# Altium PCB ExtendBoard.PcbDoc
Units mil, origin at the board's own origin, x right, y up, seen from the top; angles counter-clockwise.
Board outline 2627.77 x 1590.54 mil, 2 copper layers (Top Layer, Bottom Layer); 12 components, 17 nets, 57 pads, 10 vias.
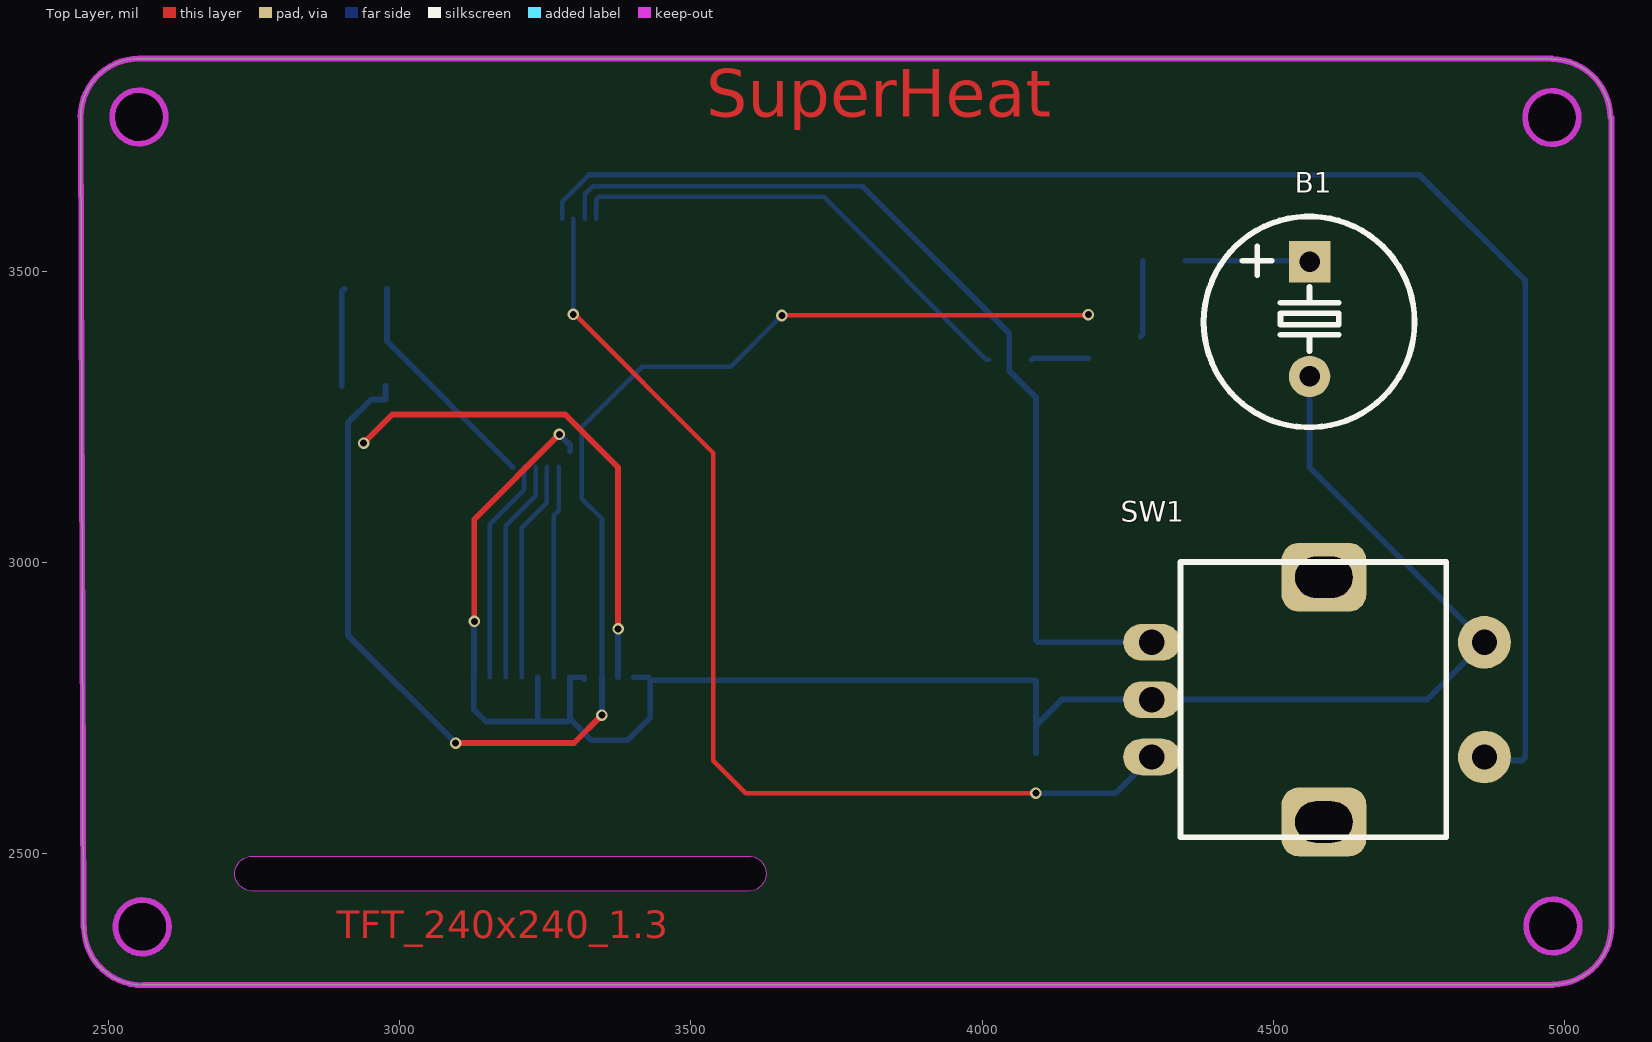
[diagram p0: Top Layer view]
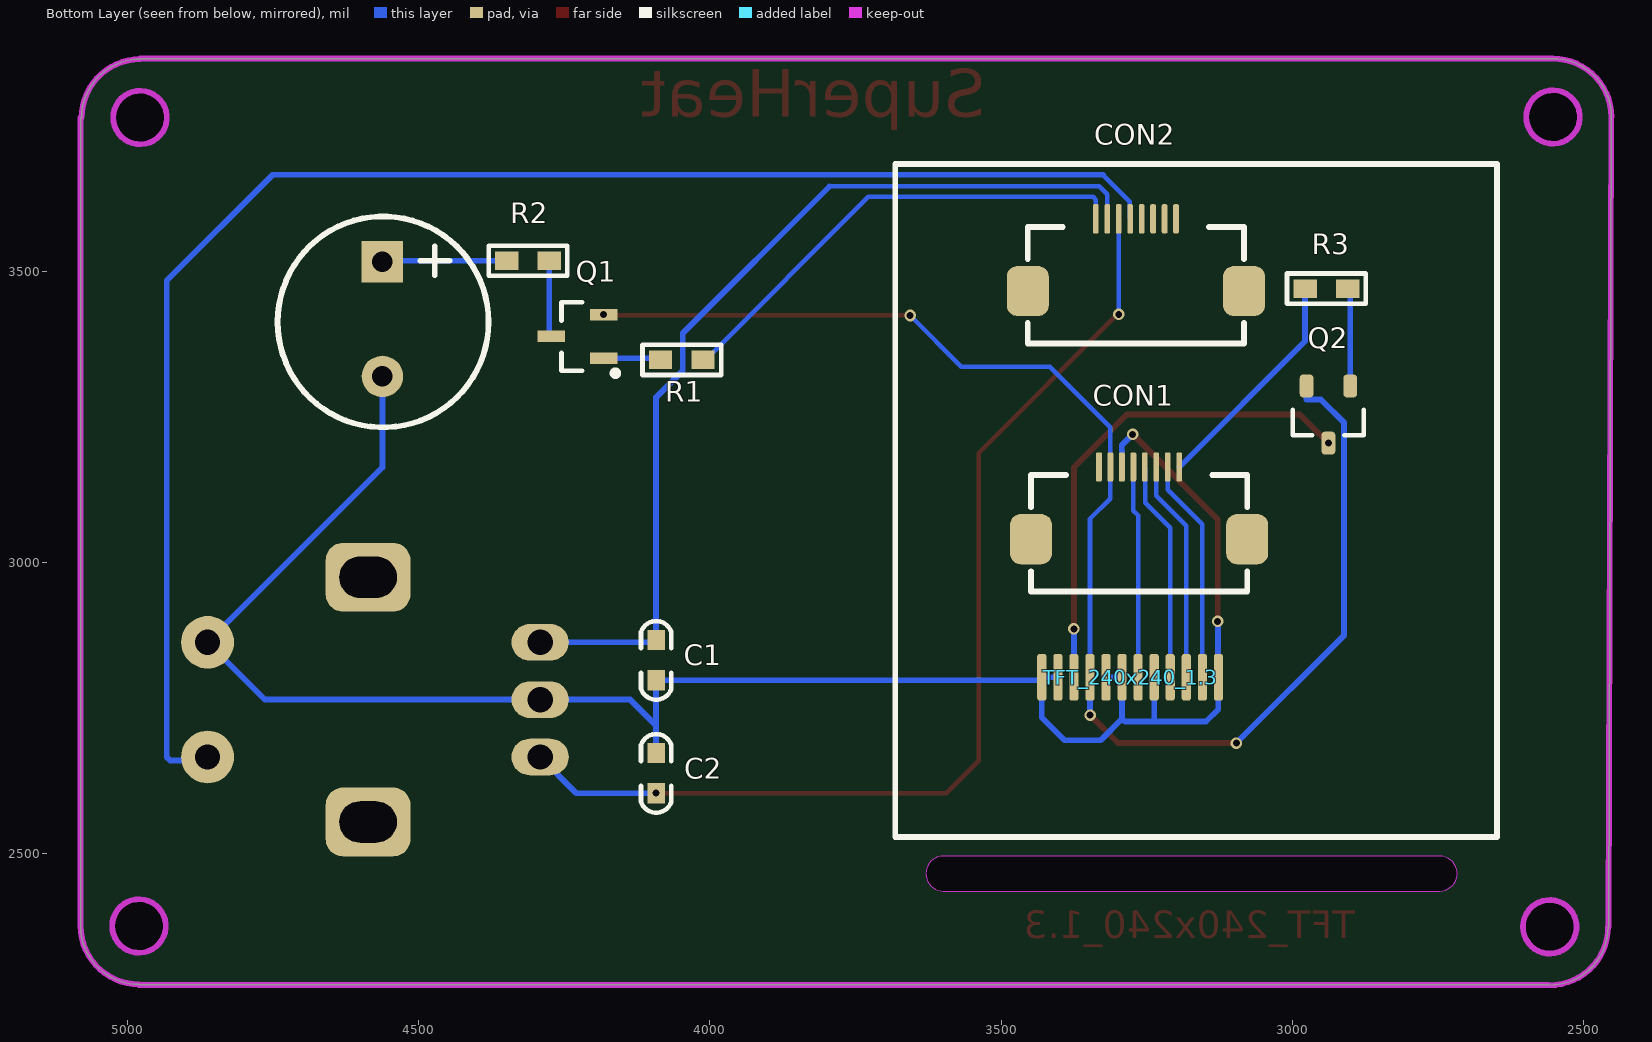
[diagram p1: Bottom Layer view, seen from below]
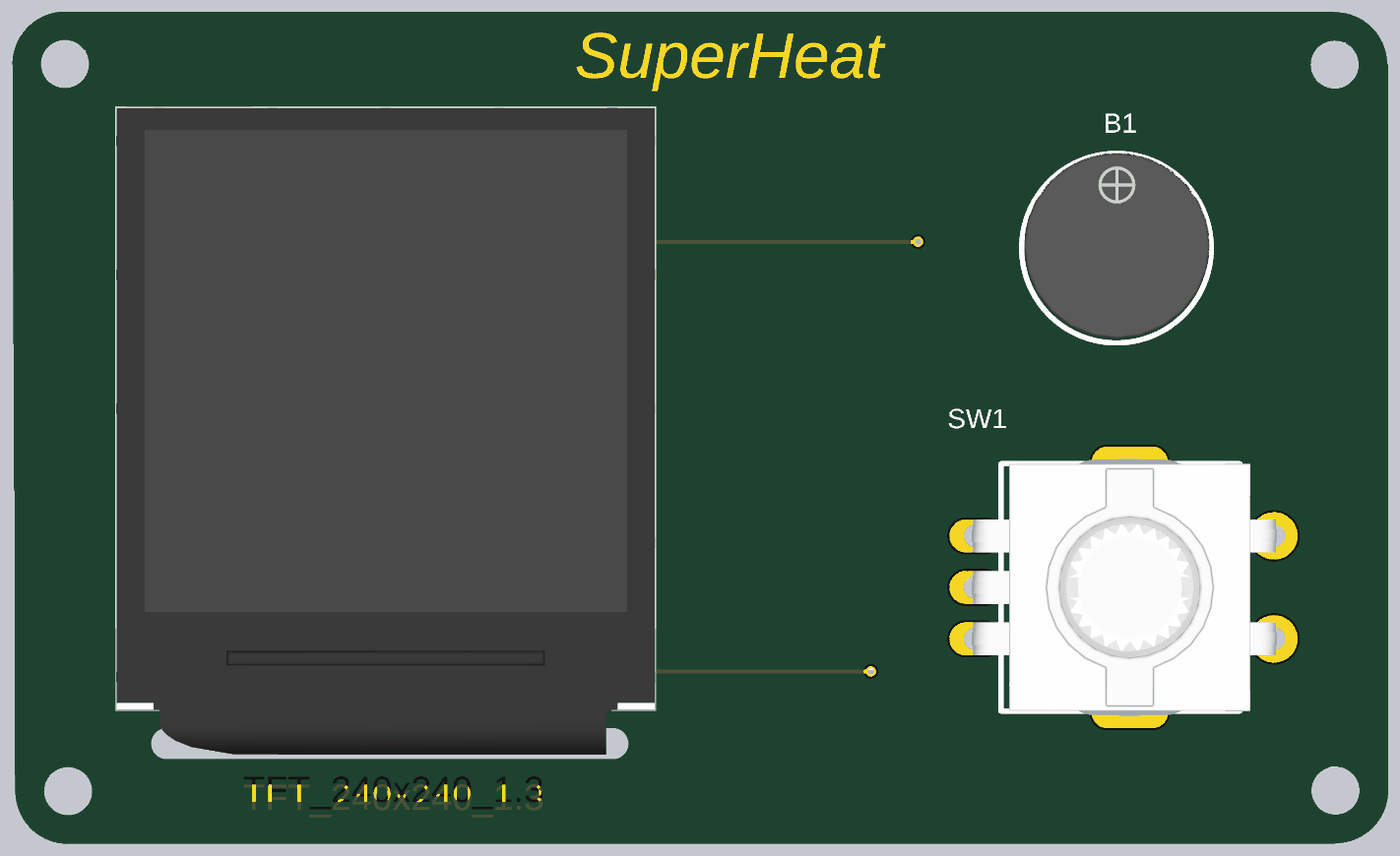
[diagram p2: 3D render of the assembled board from above, using the file's embedded part models]
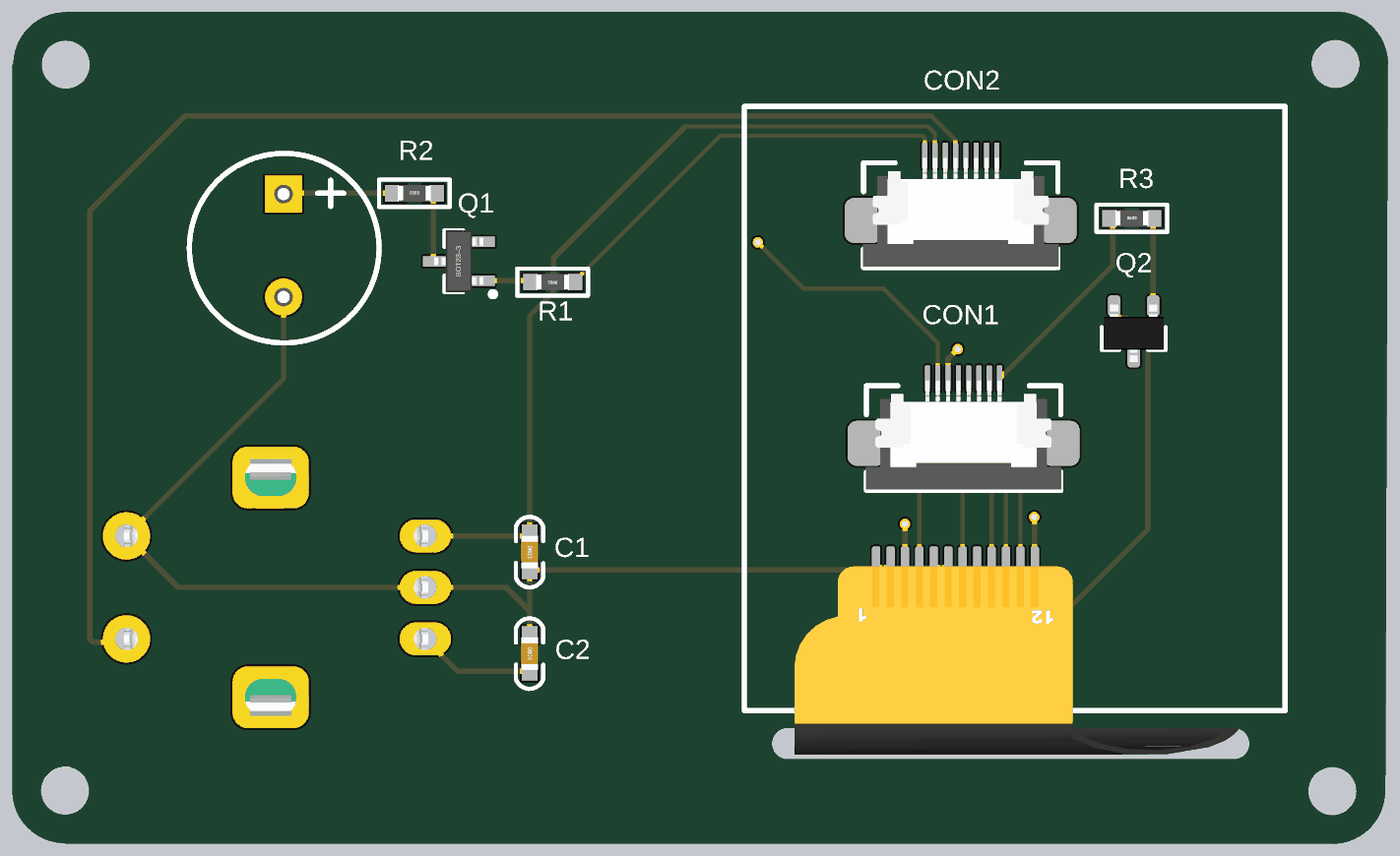
[diagram p3: 3D render of the assembled board from below, using the file's embedded part models]

## Layer stack, top to bottom
Top Solder: solder mask 0.4, Solder Resist, Dk 3.5
Top Layer: signal copper 1.4
Dielectric 1: dielectric 12.6, FR-4, Dk 4.8
Bottom Layer: signal copper 1.4
Bottom Solder: solder mask 0.4, Solder Resist, Dk 3.5

## Board outline
2457.15,2374.64 2452.39,3764.47 2452.23,3764.81 cw(c2552.42,3764.81) 2552.42,3865 4978,3865 4978,3864 cw(c4978,3763.81) 5078.19,3763.81 5080,3763.81 5080,2376 cw(c4979.81,2376) 4979.81,2275.81 4979.81,2275 2560,2275 2558.07,2274.46 cw(c2558.07,2374.65)
cut-out: 2552.5,3719.07 cw(c2552.5,3765.07) 2506.5,3765.07 cw(c2552.5,3765.07) 2552.5,3811.07 cw(c2552.5,3765.07) 2598.5,3765.07 cw(c2552.5,3765.07)
cut-out: 4932,3763.81 ccw(c4978,3763.81) 4978,3717.81 ccw(c4978,3763.81) 5024,3763.81 ccw(c4978,3763.81) 4978,3809.81 ccw(c4978,3763.81)
cut-out: 4933.5,2376.07 ccw(c4979.5,2376.07) 4979.5,2330.07 ccw(c4979.5,2376.07) 5025.5,2376.07 ccw(c4979.5,2376.07) 4979.5,2422.07 ccw(c4979.5,2376.07)
cut-out: 2512.5,2375.07 ccw(c2558.5,2375.07) 2558.5,2329.07 ccw(c2558.5,2375.07) 2604.5,2375.07 ccw(c2558.5,2375.07) 2558.5,2421.07 ccw(c2558.5,2375.07)
cut-out: 2747,2435.98 cw(c2747,2466) 2747,2496.01 3599,2496.01 cw(c3599,2466) 3629.01,2466 cw(c3599,2466) 3599,2435.99
cut-out: 2518,3787
cut-out: 2452,3600

## Design rules (kind name [scope] priority, off if disabled: settings)
Clearance [All] p1: gap=10 ignorepadtopadclearanceinfootprint=TRUE except(0: Arc-Hole Track-Hole SMDPad-Hole THPad-Hole Via-Hole Fill-Hole Poly-Hole Region-Hole Text-Hole; 6: SMDPad-SMDPad)
ComponentClearance [All] p1: gap=10 collisioncheckmode=3 verticalgap=5 showdistances=FALSE
HoleToHoleClearance [All] p1: gap=5 allowstackedmicrovias=TRUE
MinimumSolderMaskSliver [All] p1: minsoldermaskwidth=0
PolygonConnect [All] p1: connectstyle=Relief reliefconductorwidth=10 reliefentries=4 polygonreliefangle="90 Angle" airgapwidth=10
RoutingVias [All] p1: holewidth=12 width=20 viastyle="Through Hole" minholewidth=12 minwidth=20 maxholewidth=28 maxwidth=50
SilkToSilkClearance [All] p1: silktosilkclearance=0
SilkToSolderMaskClearance [IsPad] p1: minsilkscreentomaskgap=0 clearancetoexposedcopper=TRUE
SolderMaskExpansion [All] p1: expansion=4 istentingtop=FALSE
Width [All] p1: maxlimit=20 minlimit=6 preferedwidth=8
25 further rules are at their usual default settings.

## Components (designator, comment, footprint, x,y, rotation, side; value= is the part's Value field where it differs from the comment)
B1 "DC5V" "BEEP 5x9x5.5" 4562,3418 r180 top
C1 "104" "C 0603" 4092,2832 r270 bottom
C2 "104" "C 0603" 4092,2638 r270 bottom
CON1 "FFC_0.5_8" FFC_0.5_8 3263,3075 r180 bottom
CON2 "FFC_0.5_8" FFC_0.5_8 3268.37,3501 r180 bottom
Q1 "SS8550" SOT23-3N 4227,3388 r90 bottom
Q2 "AO3415A" SOT23-3 2938,3254 r270 bottom
R1 "100R" "R 0603" 4048,3348 r0 bottom
R2 "1K" "R 0603" 4312,3518 r180 bottom
R3 "1K" "R 0603" 2941.5,3470 r180 bottom
SW1 "EC11" EC11-B 4576.57,2764.57 r180 top
TFT_240x240_1.3 "LCD-240x240" LCD-240x240-NoHole 3148,3010 r0 top (schematic designator 1)

## Footprints (in the part's own frame and the unit in brackets; to place one, negate y for a bottom-side part, rotate by r counter-clockwise, add the part's x,y. Pads: shape width x height; smd on the part's side, far side on the other; paste and mask are expansions set on the pad)
"BEEP 5x9x5.5" [mm] "5*9*5.5mm(脚距,直径,高度)"
  rect 1.8x1.8 hole 0.9: 1(0,-2.5)
  round 1.8 hole 0.9: 2(0,2.5)
  silkscreen extent -4.58,-4.47 4.62,4.72, body extent -4.5,-4.5 4.5,4.5, height 5.45
"C 0603" [mil] "无极性贴片电容"
  rect 35x30 smd: 1(-35,0) 2(34,0)
  silkscreen extent -67,-26 67,26, body extent -31,-16 31,16, height 32
EC11-B [mm] "数字开关编码器"
  rrect50% 3.7x3 hole 1.8 slot 2.5 at 0 deg: 0(-0.254,5.334) 0(-0.254,-5.334)
  round 2.3 hole 1.1: 1(-7.25,2.5) 2(-7.25,-2.5)
  oval 2.5x1.6 hole 1.1: A(7.25,-2.5) B(7.25,2.5) C(7.25,0)
  silkscreen extent -5.59,-6 6,6, body extent -7.4,-6.24 7.4,6.24, height 22
FFC_0.5_8 [mil]
  rrect50% 72x86 smd: 0(-185.63,-35) 0(185.63,-35)
  rrect50% 10x50 smd: 1(-68.9,89) 2(-49.21,89) 3(-29.53,89) 4(-9.84,89) 5(9.84,89) 6(29.53,89) 7(49.21,89) 8(68.9,89)
  silkscreen extent -186,-125 186,75, body extent -187,-124 187,87, height 82
LCD-240x240-NoHole [mil]
  rrect50% 15.75x80 smd far side: 1(282,-207) 2(254.44,-207) 3(226.88,-207) 4(199.32,-207) 5(171.76,-207) 6(144.2,-207) 7(116.65,-207) 8(89.09,-207) 9(61.53,-207) 10(33.97,-207) 11(6.41,-207) 12(-21.15,-207)
  body extent -499,-565 534,673, height 20
"R 0603" [mil] "1/10W贴片电阻"
  rect 40x31.5 smd: 1(-36.5,0) 2(36.5,0)
  silkscreen extent -68,-26 68,26, body extent -31,-16 31,16, height 16
SOT23-3 [mm]
  rrect50% 1x0.6 smd: 1(-1.246,0.95) 2(-1.246,-0.95) 3(1.246,0)
  silkscreen extent -0.2,-1.55 0.9,1.55, body extent -1.3,-1.45 1.5,1.45, height 1.2
SOT23-3N [mm] "3x1.3x1mm(长宽高)"
  rect 0.5x1.2 smd: 1(-0.95,-1.143) 2(0.95,-1.143) 3(0,1.143)
  silkscreen extent -1.72,-1.78 1.5,0.7, body extent -1.5,-1.2 1.5,1.2, height 1.05

## Part data
B1: library part BEEP, "蜂鸣器", BOM名称=蜂鸣器, 学习资源=www.ooocke.com, 版权归属=源创客
C1 C2: library part C, "无极性贴片电容", BOM名称=无极性贴片电容, 学习资源=www.ooocke.com, 版权归属=源创客
CON1 CON2: "FFC", System=Connector
Q1: library part 8550-SMD, "高频放大-PNP型", BOM名称=高频放大-PNP型, 学习资源=www.ooocke.com, 属性="40V 1.5A 1W 100MHZ", 版权归属=源创客
Q2: "MOSFET", LatestRevisionDate=17-Jul-2002, LatestRevisionNote="Re-released for DXP Platform.", PackageDescription="TO, Flat Index; 3 In-Line, Axial Leads; Body Dia. 4.6mm; Lead Dia. 0.5 mm (max)", PackageReference=E3, PackageVersion=1995/1996, Published=8-Jun-2000, Publisher="Altium Limited"
R1 R2 R3: library part R, "贴片电阻", BOM名称=贴片电阻, 学习资源=www.ooocke.com, 版权归属=源创客
SW1: "数字开关编码器", BOM名称=数字编码开关, 学习资源=www.ooocke.com, 版权归属=源创客
TFT_240x240_1.3: "显示屏"

## Via types
v1: diameter 20, hole 12, Top Layer to Bottom Layer, 10 vias

## Nets (pads, with @x,y where several pads share a name; then routed paths per layer and width w, separated by ;. In a path a pad name is that pad's centre, name@x,y a point inside that pad or via, vN(x,y) a via of type N, cw(c..) or ccw(c..) an arc to the next point about the centre after c; other vN are vias at no path point)
3V3: CON1.2 Q1.2 Q2.2 TFT_240x240_1.3.4 | length 2460.2
  Top Layer w8: v1(3656,3424) 3656.7,3424.7 4181.3,3424.7 v1(4182,3425.4)
  Top Layer w10: v1(3096,2690) 3299,2690 v1(3347,2738)
  Bottom Layer w8: TFT_240x240_1.3.4 3347.32,3074.68 3312.21,3109.79 CON1.2 3312.21,3232.21 3416,3336 3568,3336 v1(3656,3424)
  Bottom Layer w10: Q2.2 2975.4,3280 2951,3280 2911,3240 2911,2875 v1(3096,2690) ; v1(3347,2738) 3347.16,2738.16 3347.16,2802.84 TFT_240x240_1.3.4
5V: CON1.1
BEEP: CON2.1 R1.1 | length 825
  Bottom Layer w8: CON2.1 3337.27,3622.97 3341.95,3627.66 3727.59,3627.66 4007.25,3348 R1.1
BL_PWM: CON1.8 R3.1 | length 395.4
  Bottom Layer w10: R3.1 2978,3379.79 CON1.8@3193.79,3164
BL_PWM_OUT: Q2.3 TFT_240x240_1.3.3 | length 856.6
  Top Layer w10: v1(2938,3204.94) 2987.06,3254 3284,3254 3375,3163 v1(3375,2886) v1@3375,2884.45
  Bottom Layer w10: TFT_240x240_1.3.3 3374.94,2803.06 3374.94,2885.94 v1(3375,2886)
DC: CON1.4 TFT_240x240_1.3.7 | length 364.4
  Bottom Layer w8: TFT_240x240_1.3.7 3264.65,3080.65 3272.84,3088.84 CON1.4
EC11_A: C1.1 CON2.2 SW1.A | length 1626.8
  Bottom Layer w8: CON2.2@3317.79,3590 3317.79,3631.79 3331.66,3645.66 3794.34,3645.66
  Bottom Layer w10: 3794.34,3645.66 4046.5,3393.5 4046.5,3329.04 4092,3283.54 C1.1 4096,2863 SW1.A
EC11_B: C2.2 CON2.3 SW1.B | length 1832.8
  Top Layer w8: v1(3297.9,3425.9) 3300.1,3425.9 3538,3188 3538,2660 3594,2604 v1(4092,2604)
  Bottom Layer w8: v1(3297.9,3425.9) CON2.3
  Bottom Layer w10: v1(4092,2604) 4228.98,2604 SW1.B
EC11_SW: CON2.4 SW1.1 | length 2670.4
  Bottom Layer w8: CON2.4 3278.9,3590.68 3278.9,3619.33 3325,3665.44
  Bottom Layer w10: 3324.79,3665.66 4750.34,3665.66 4932,3484 4932,2665.86 4926.14,2660 4868.15,2660 SW1.1
GND: B1.2 C1.2 C2.1 CON1.3 SW1.2 SW1.C TFT_240x240_1.3.1 TFT_240x240_1.3.2 TFT_240x240_1.3.5 TFT_240x240_1.3.6 TFT_240x240_1.3.8 TFT_240x240_1.3.12 | length 3380.4
  Top Layer w10: v1@3128,2900.71 3128,3074 v1(3274,3220)
  Bottom Layer w10: TFT_240x240_1.3.12 TFT_240x240_1.3.12@3127.14,2803.29 ; v1(3128,2899) 3127.43,2898.43 3127.43,2803.57 TFT_240x240_1.3.12@3127.14,2803.29 ; TFT_240x240_1.3.8 3237.09,2727.44 3236.65,2727 ; v1(3274,3220) 3292.84,3201.16 3292.84,3191.78 3292.21,3191.15 ; TFT_240x240_1.3.5@3316.89,2800.13 3316.89,2803 TFT_240x240_1.3.6 3292.2,2731.8 ; TFT_240x240_1.3.2 3427.13,2803 3430,2800.13 TFT_240x240_1.3.1@3430,2798 ; C2.1 4092,2720 ; B1.2 4562,3163 SW1.2 4763.57,2764.57 SW1.C 4136.57,2764.57 4092,2720 ; TFT_240x240_1.3.12@3127.14,2803.29 3127.14,2747.86 3148,2727 3236.65,2727 ; 3236.65,2727 3287.41,2727 3292.2,2731.8 ; 3292.2,2731.8 3329,2695 3391,2695 3430,2734 TFT_240x240_1.3.1@3430,2798 ; TFT_240x240_1.3.1@3430,2798 C1.2 4092,2720
MOSI: CON1.6 TFT_240x240_1.3.10 | length 382.3
  Bottom Layer w8: TFT_240x240_1.3.10 3181.97,3062.97 3233.47,3114.47 CON1.6
NetB1_1: B1.1 R2.1 | length 214.2
  Bottom Layer w10: R2.1 4560.43,3518 B1.1
NetQ1_1: Q1.1 R1.2 | length 98.6
  Bottom Layer w10: R1.2 4087.1,3350.6 Q1.1
NetQ1_3: Q1.3 R2.2 | length 131.4
  Bottom Layer w10: Q1.3 4275.5,3391.5 R2.2
NetQ2_1: Q2.1 R3.2 | length 168.8
  Bottom Layer w10: Q2.1 2900.6,3465.6 R3.2
RES: CON1.7 TFT_240x240_1.3.11 | length 385.6
  Bottom Layer w8: TFT_240x240_1.3.11 3154.41,3065.41 3213.79,3124.79 CON1.7
SCK: CON1.5 TFT_240x240_1.3.9 | length 379.1
  Bottom Layer w8: TFT_240x240_1.3.9 3209.53,3059.53 3252.47,3102.47 3252.47,3163.32 CON1.5
pads on no net: CON1.0 CON2.0 CON2.5 CON2.6 CON2.7 CON2.8 SW1.0

## Keep-outs
Keep-Out Layer:
  circle w10: c2558.07,2374.65 r46
  circle w10: c4979.81,2376 r46
  circle w10: c4978,3763.81 r46
  circle w10: c2552.42,3764.81 r46
  lines w10: 2452.23,3764.81 cw(c2552.42,3764.81) 2552.42,3865 4978,3865 ; 2452.39,3764.47 2457.15,2374.64 ; 2457.87,2374.65 ccw(c2558.07,2374.65) 2558.07,2274.46 ; 2560,2275 4979.81,2275 ; 4978,3864 cw(c4978,3763.81) 5078.19,3763.81 ; 4979.81,2275.81 ccw(c4979.81,2376) 5080,2376 5080,3763.81

## Other copper
Top Layer:
  text "SuperHeat" at 3526,3738.88 h140
  text "TFT_240x240_1.3" at 2892,2339.21 h80

## Silkscreen, mask and mechanical layers (free items; w line width, h text height)
Top Solder:
  text "SuperHeat" at 3526,3738.88 h140
Mechanical 1:
  circle w10: c2552.5,3765.07 r46
  circle w10: c2558.5,2375.07 r46
  circle w10: c4979.5,2376.07 r46
  circle w10: c4978,3763.81 r46
  lines w60: 2747,2466 3599,2466

## Dimensions
2552.42,3865 to 2560,2275 on Mechanical 1
2452.39,3764.47 to 5080,2376 on Mechanical 1